# Altium PCB IG-2.PCBDOC (part 1 of 3)
Units mil, origin at the board's own origin, x right, y up, seen from the top; angles counter-clockwise.
Board outline 1834.65 x 964.57 mil, 4 copper layers (Top, GND Plane, Mid1-Ver, Bottom), stack 61.6 mil thick; 34 components, 46 nets, 345 pads, 276 vias.
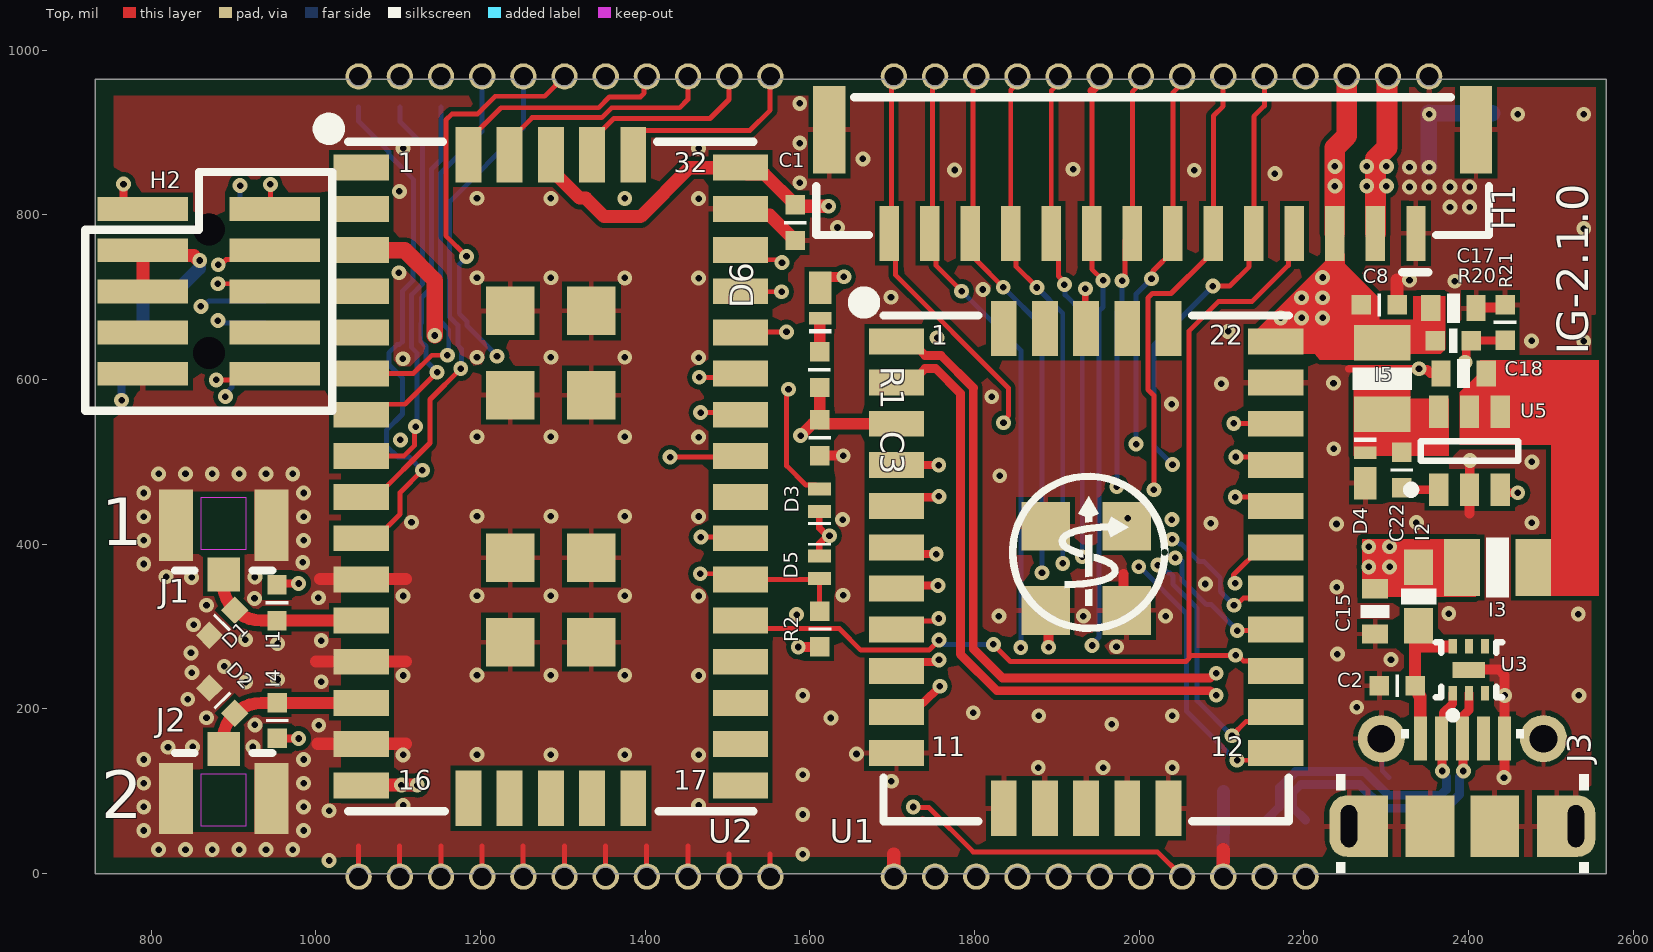
[diagram p0: Top view]
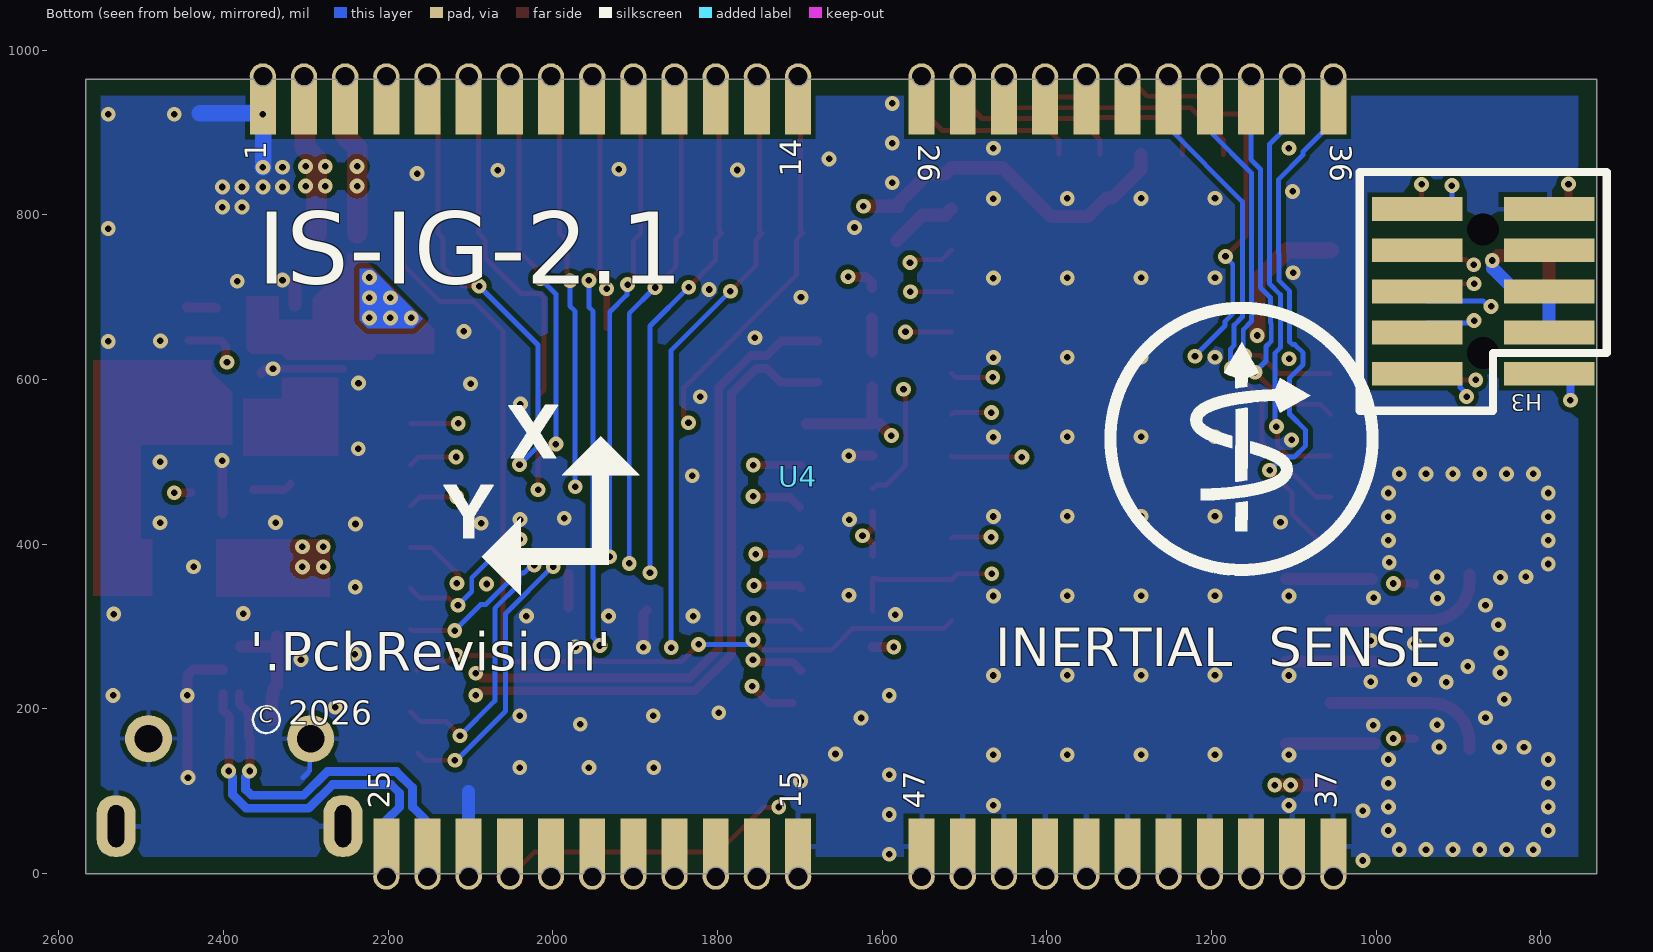
[diagram p1: Bottom view, seen from below]
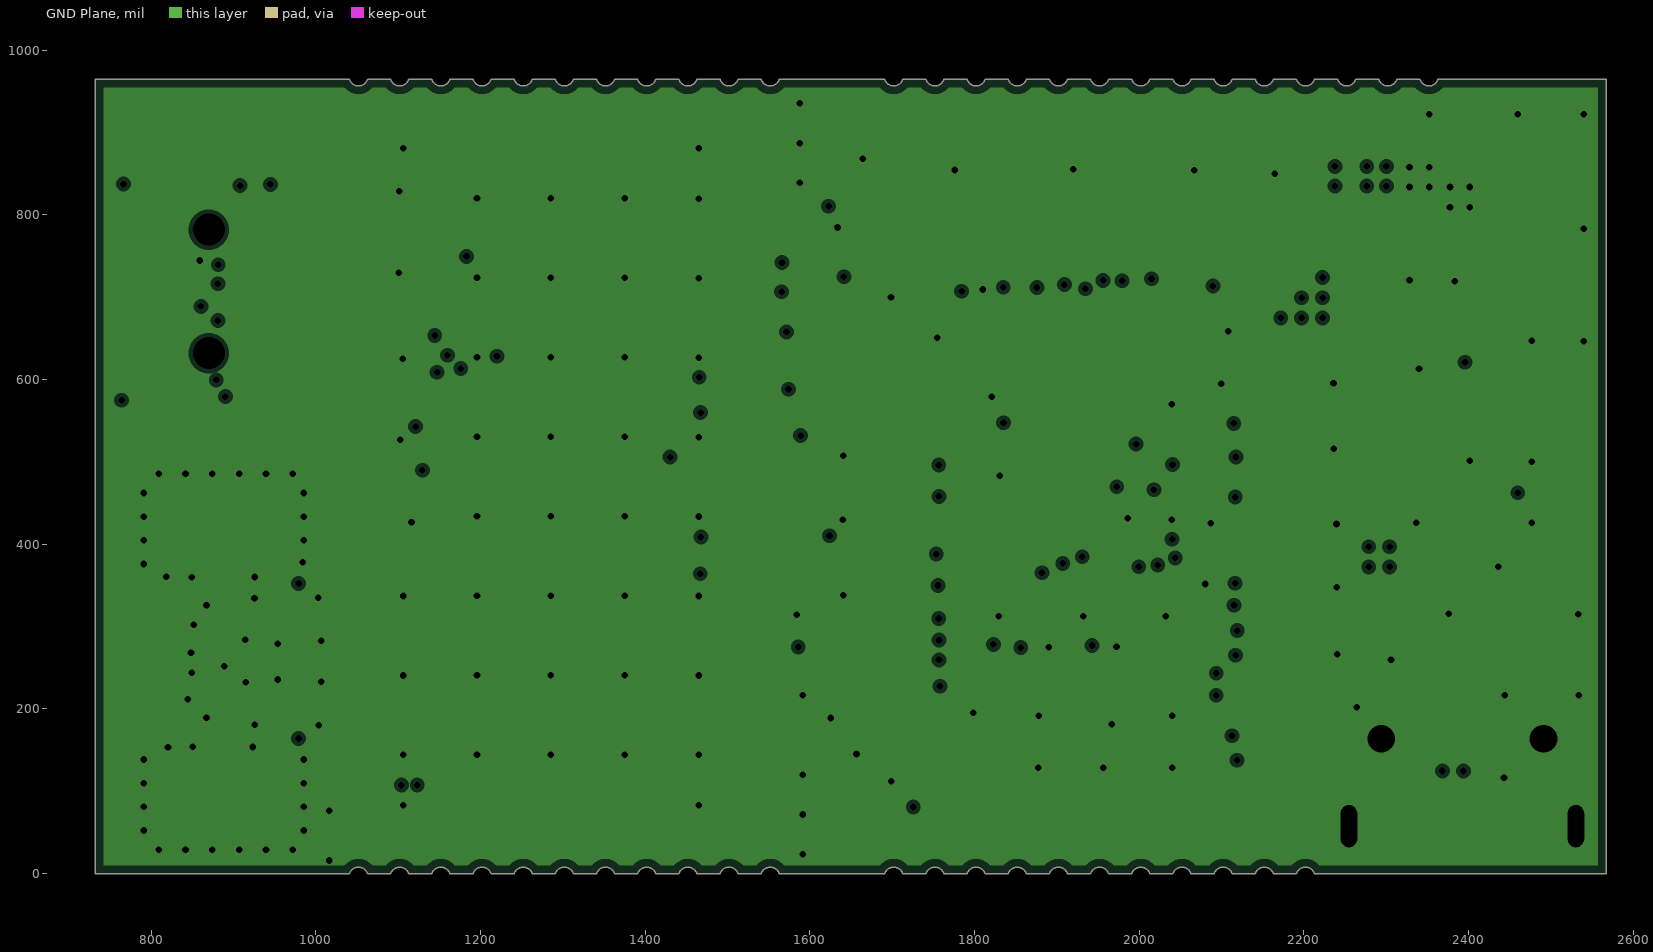
[diagram p2: GND Plane, clearances drawn from the general rule]
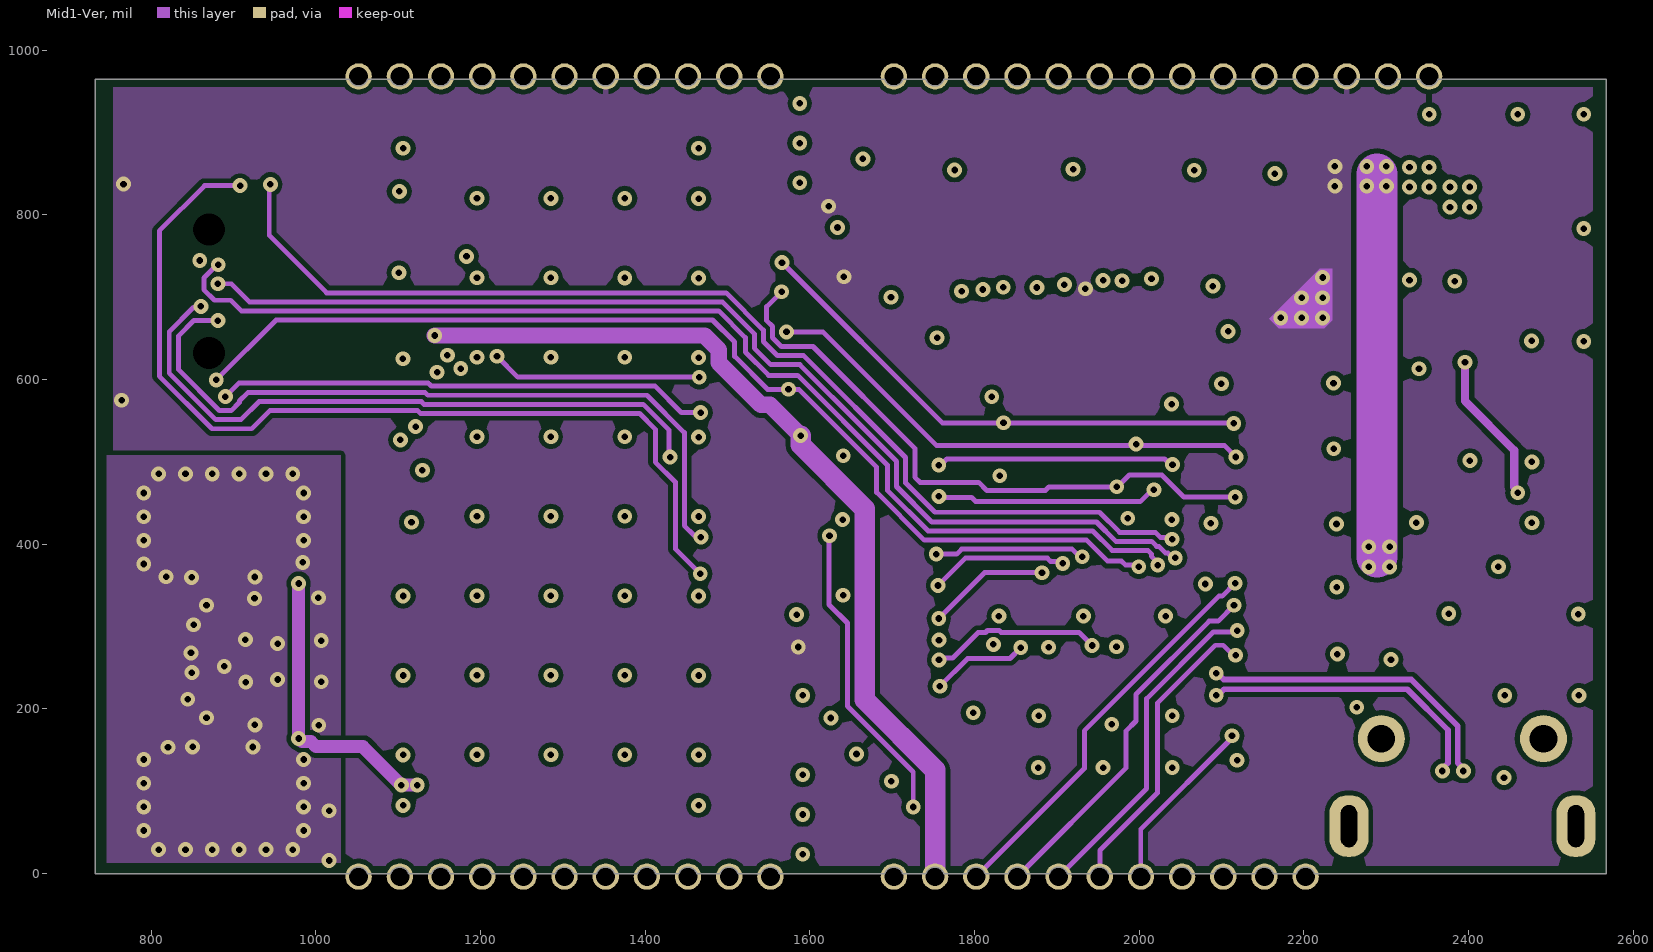
[diagram p3: Mid1-Ver]
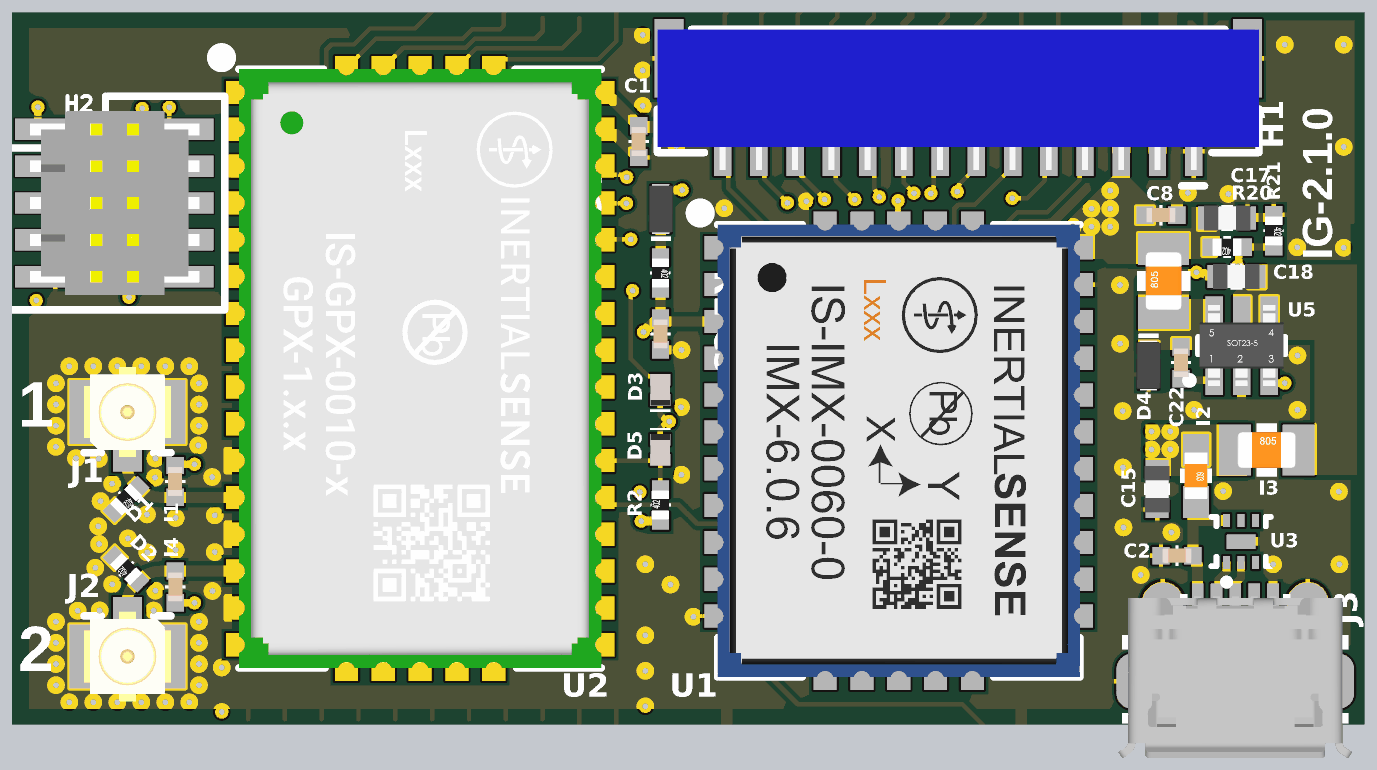
[diagram p5: 3D render of the assembled board from above, using the file's embedded part models]

## Layer stack, top to bottom
Solder Mask Top: solder mask 0.4, Solder Resist, Dk 3.5
Top: signal copper 2.1
Dielectric1: prepreg 8, PP-006, Dk 4.1
GND Plane: plane copper 0.7, net GND
Dielectric3: core 40, Core-009, Dk 4.5
Mid1-Ver: signal copper 0.7
Dielectric2: prepreg 8, PP-006, Dk 4.1
Bottom: signal copper 2.1
Solder Mask Bottom: solder mask 0.4, Solder Resist, Dk 3.5

## Board outline
1112.8,0 1140.92,0 cw(c1151.86,-3.54) 1162.8,0 1190.92,0 cw(c1201.86,-3.54) 1212.8,0 1240.92,0 cw(c1251.86,-3.54) 1262.8,0 1290.92,0 cw(c1301.86,-3.54) 1312.8,0 1340.92,0 cw(c1351.86,-3.54) 1362.8,0 1390.92,0 cw(c1401.86,-3.54) 1412.8,0 1440.92,0 cw(c1451.86,-3.54) 1462.8,0 1490.92,0 cw(c1501.86,-3.54) 1512.8,0 1540.92,0 cw(c1551.86,-3.54) 1562.8,0 1690.92,0 cw(c1701.86,-3.54) 1712.8,0 1740.92,0 cw(c1751.86,-3.54) 1762.8,0 1790.92,0 cw(c1801.86,-3.54) 1812.8,0 1840.92,0 cw(c1851.86,-3.54) 1862.8,0 1890.92,0 cw(c1901.86,-3.54) 1912.8,0 1940.92,0 cw(c1951.86,-3.54) 1962.8,0 1990.92,0 cw(c2001.86,-3.54) 2012.8,0 2040.92,0 cw(c2051.86,-3.54) 2062.8,0 2090.92,0 cw(c2101.86,-3.54) 2112.8,0 2140.92,0 cw(c2151.86,-3.54) 2162.8,0 2190.92,0 cw(c2201.86,-3.54) 2212.8,0 2566.93,0 2566.93,964.57 2566.7,964.57 2362.8,964.57 cw(c2351.86,968.11) 2340.92,964.57 2312.8,964.57 cw(c2301.86,968.11) 2290.92,964.57 2262.8,964.57 cw(c2251.86,968.11) 2240.92,964.57 2212.8,964.57 cw(c2201.86,968.11) 2190.92,964.57 2162.8,964.57 cw(c2151.86,968.11) 2140.92,964.57 2112.8,964.57 cw(c2101.86,968.11) 2090.92,964.57 2062.8,964.57 cw(c2051.86,968.11) 2040.92,964.57 2012.8,964.57 cw(c2001.86,968.11) 1990.92,964.57 1962.8,964.57 cw(c1951.86,968.11) 1940.92,964.57 1912.8,964.57 cw(c1901.86,968.11) 1890.92,964.57 1862.8,964.57 cw(c1851.86,968.11) 1840.92,964.57 1812.8,964.57 cw(c1801.86,968.11) 1790.92,964.57 1762.8,964.57 cw(c1751.86,968.11) 1740.92,964.57 1712.8,964.57 cw(c1701.86,968.11) 1690.92,964.57 1562.8,964.57 cw(c1551.86,968.11) 1540.92,964.57 1512.8,964.57 cw(c1501.86,968.11) 1490.92,964.57 1462.8,964.57 cw(c1451.86,968.11) 1440.92,964.57 1412.8,964.57 cw(c1401.86,968.11) 1390.92,964.57 1362.8,964.57 cw(c1351.86,968.11) 1340.92,964.57 1312.8,964.57 cw(c1301.86,968.11) 1290.92,964.57 1262.8,964.57 cw(c1251.86,968.11) 1240.92,964.57 1212.8,964.57 cw(c1201.86,968.11) 1190.92,964.57 1162.8,964.57 cw(c1151.86,968.11) 1140.92,964.57 1112.8,964.57 cw(c1101.86,968.11) 1090.92,964.57 1062.8,964.57 cw(c1051.86,968.11) 1040.92,964.57 732.28,964.57 732.28,0 1040.92,0 cw(c1051.86,-3.54) 1062.8,0 1090.92,0 cw(c1101.86,-3.54)

## Design rules (kind name [scope] priority, off if disabled: settings)
AssemblyTestPointUsage [All] p1 off:
AssemblyTestpoint [All] p1 off: testpointundercomponent=TRUE minsize=40 maxsize=100 preferedsize=60 minholesize=0 maxholesize=40 preferedholesize=32 testpointgrid=1 usegrid=TRUE gridtolerance=0.01 allowsidetop=TRUE allowsidebottom=TRUE
BoardOutlineClearance BoardOutlineClearance_1 [OnLayer('Silkscreen Top')] p1: gap=0 ignorepadtopadclearanceinfootprint=FALSE
BoardOutlineClearance [All] p2 off: gap=9.84 ignorepadtopadclearanceinfootprint=FALSE
Clearance "Stitching GND" [IsStitchingVia and InNet('GND') vs (IsVia and (Not IsStitchingVia)) Or IsPad] p1: gap=1.97 ignorepadtopadclearanceinfootprint=FALSE
Clearance "Clearance - GPS Ant" [All vs InNet('GPS1_ANT')] p2: gap=8 ignorepadtopadclearanceinfootprint=FALSE except(0: Arc-Hole Track-Hole SMDPad-Hole THPad-Hole Via-Hole Fill-Hole Poly-Hole Region-Hole Text-Hole)
Clearance [All] p3: gap=5 ignorepadtopadclearanceinfootprint=FALSE except(0: Arc-Hole Track-Hole SMDPad-Hole THPad-Hole Via-Hole Fill-Hole Poly-Hole Region-Hole Text-Hole; 5.91: Arc-Fill Arc-Poly Arc-Region Track-Fill Track-Poly Track-Region SMDPad-Fill SMDPad-Poly SMDPad-Region THPad-Fill THPad-Poly THPad-Region Via-Fill Via-Poly Via-Region Fill-Fill Fill-Poly Fill-Region Poly-Poly Poly-Region Region-Region)
ComponentClearance Ignore [InComponent('H7')] p1: gap=-500 collisioncheckmode=3 verticalgap=-500 showdistances=FALSE
ComponentClearance HeaderClearance [InComponent('H1')] p2: gap=10 collisioncheckmode=3 verticalgap=-10 showdistances=FALSE
ComponentClearance Default [All] p3: gap=10 collisioncheckmode=3 verticalgap=10 showdistances=FALSE
DiffPairsRouting USB [InDifferentialPairClass('USB')] p1: maxlimit=5 minlimit=5 mostfreqgap=5 toplayer_minwidth=10.7 toplayer_maxwidth=10.8 toplayer_prefwidth=10.73 midlayer1_minwidth=6.9 midlayer1_maxwidth=7 midlayer1_prefwidth=6.97 bottomlayer_minwidth=10.7 bottomlayer_maxwidth=10.8 bottomlayer_prefwidth=10.73 impedanceprofiledriven=TRUE impedanceprofileid={BBA8E3E2-537E-421E-AE39-E3884618F825} impedanceprofilevalue=90.000000 maxuncoupledlength=500
DiffPairsRouting [All] p2: maxlimit=8 minlimit=8 mostfreqgap=8 toplayer_minwidth=8 toplayer_maxwidth=15 toplayer_prefwidth=15 midlayer1_minwidth=8 midlayer1_maxwidth=15 midlayer1_prefwidth=15 bottomlayer_minwidth=8 bottomlayer_maxwidth=15 bottomlayer_prefwidth=15 maxuncoupledlength=500
FabricationTestPointUsage [All] p1 off: valid=0 allowmultiple=FALSE
FabricationTestpoint [All] p1 off: side=3 testpointundercomponent=TRUE minsize=40 maxsize=100 preferedsize=60 minholesize=0 maxholesize=40 preferedholesize=32 testpointgrid=1 allowsidetop=TRUE allowsidebottom=TRUE usegrid=TRUE gridtolerance=0.01
HoleSize [All] p1: absolutevalues=TRUE maxlimit=200 minlimit=8 maxpercent=80.000 minpercent=20.000
HoleToHoleClearance [All] p1: gap=9 allowstackedmicrovias=TRUE
MinimumAnnularRing [All] p1: minimumring=4.5
MinimumSolderMaskSliver [All] p1: minsoldermaskwidth=3
PlaneClearance [All] p1: clearance=5
PlaneConnect "Power Plane Connect Style" [All] p1: planeconnectstyle=Direct reliefexpansion=20 reliefentries=4 reliefconductorwidth=7 reliefairgap=10
PolygonConnect "No Thermal Polygon Connect" [All vs InNamedPolygon('+1.8_L-01_P-002') or InNamedPolygon('GND_L01_P044') or InPolygonClass('NO THERMALS')] p1: connectstyle=Direct reliefconductorwidth=10 reliefentries=4 polygonreliefangle="90 Angle" airgapwidth=10
PolygonConnect "Default Polygon Connect" [All] p2: thpad.connectstyle=Relief thpad.reliefconductorwidth=5.91 thpad.reliefentries=4 thpad.polygonreliefangle="90 Angle" thpad.airgapwidth=5.91 smdpad.connectstyle=Relief smdpad.reliefconductorwidth=5.91 smdpad.reliefentries=4 smdpad.polygonreliefangle="90 Angle" smdpad.airgapwidth=5.91 via.connectstyle=Direct via.reliefconductorwidth=10 via.reliefentries=4 via.polygonreliefangle="90 Angle" via.airgapwidth=10
RoutingCorners "Routing Corners Default" [All] p1: cornerstyle=45-Degree minsetback=100 maxsetback=100
RoutingLayers "Routing Layers Default" [All] p1: top layer_v5=TRUE mid layer 1_v5=TRUE bottom layer_v5=TRUE
RoutingPriority "Routing Priority Default" [All] p1: routingpriority=0
RoutingVias "Via Style Default" [All] p1: holewidth=8 width=18 viastyle="Through Hole" minholewidth=8 minwidth=18 maxholewidth=8 maxwidth=18
SilkToBoardRegionClearance [All] p1 off:
SilkToSilkClearance [Not ( ((ObjectKind = 'Text') And ((UseInvertedRectangle = 'True') OR (IsTextInverted = 'True'))) OR (ObjectKind = 'Fill') ) vs Not ( ((ObjectKind = 'Text') And ((UseInvertedRectangle = 'True') OR (IsTextInverted = 'True'))) OR (ObjectKind = 'Fill') )] p1: silktosilkclearance=0.98
SilkToSolderMaskClearance SilkscreenOverComponentPads [NOT(IsPad AND OnLayer('Multi-Layer'))] p1: minsilkscreentomaskgap=0 clearancetoexposedcopper=TRUE
SolderMaskExpansion SolderMaskExpansion_Via [IsVia] p1: expansion=-19.68 istentingtop=FALSE
SolderMaskExpansion "Solder Mask Expansion" [All] p2: expansion=3 istentingtop=FALSE
SupplyNets "Schematic Supply Nets_3" [InNet('VIN')] p1: voltage=0.000
SupplyNets "Schematic Supply Nets_2" [InNet('GND')] p2: voltage=0.000
SupplyNets "Schematic Supply Nets_1" [InNet('+3.3V')] p3: voltage=0.000
SupplyNets "Schematic Supply Nets" [InNet('VBAT')] p4: voltage=0.000
Width "RF GPS" [InNetClass('RF_GPS')] p1: maxlimit=14.96 minlimit=14.88 preferedwidth=14.88
Width "Width Default" [All] p2: maxlimit=150 minlimit=3 preferedwidth=6
13 further rules are at their usual default settings.

## Classes and differential pairs
differential pair class USB: USB.D
net class RF_GPS: GNSS1_ANT GNSS2_ANT
polygon class "NO THERMALS": RF_GND_L-01_P-001 RF_GND_L-03_P-001
differential pair USB.D: +USB.D_P -USB.D_N

## Components (designator, comment, footprint, x,y, rotation, side; value= is the part's Value field where it differs from the comment)
C1 "Cap" 0402 1582.28,790.55 r270 top value=0.1uF
C2 "Cap" 0402 2313.28,228.32 r180 top value=100nF
C3 "Cap" 0402 1611.89,529.36 r270 top value=2.2uF
C8 "Cap" 0402 2291.52,690.61 r0 top value=0.1uF
C15 "Cap" 0603 2286.32,318.59 r270 top value=2.2uF
C17 "Cap" 0603 2381.4,686.69 r0 top value=22uF
C18 "Cap" 0603 2394.04,607.28 r180 top value=2.2uF
C22 "Cap" 0402 2318.82,490.22 r90 top value=0.1uF
D1 "Diode - Bidirectional Zener" R0402 886.22,304.72 r225 top
D2 "Diode - Bidirectional Zener" R0402 886.22,210.11 r135 top
D3 "Diode - Schottky" D0402 1611.63,453.36 r90 top
D4 "Diode - Schottky" D0603B 2274.66,486.58 r270 top
D5 "Diode - Schottky" D0402 1611.63,372.05 r270 top
D6 "Diode - Schottky" D0603B 1612.51,699.01 r90 top
H1 "Hdr - 14pin - mount" SM14B-GHS-TB(LF)(SN) 2016.21,956.74 r180 top locked
H2 "Hdr - 5x2pin" FTSH-105-01-L-DV-K-A-P 870.08,707.09 r270 top
H3 "Hdr - 5x2pin" FTSH-105-01-L-DV-K-A-P 870.08,707.09 r90 bottom
I1 "Inductor" 0402 952.91,328.99 r270 top value=120nH
I2 "Inductor" I0603 2339.3,336.68 r270 top value="220 Ohm @ 100MHz"
I3 "Inductor" 0806 2435.18,371.7 r0 top value=2.2uH
I4 "Inductor" 0402 953.1,185.85 r90 top value=120nH
I5 "Inductor" 0806 2295.1,601.29 r90 top value=2.2uH
J1 "RF - GND x 2" "RF UMC SMD" 888.12,423.23 r270 top locked
J2 "RF - GND x 2" "RF UMC SMD" 888.12,91.37 r90 top locked
J3 "USB-TYPEAB-4GND" "USB Micro AB R/A THR" 2392.51,57.75 r0 top locked
R1 "Res" R0402 1611.89,612.04 r270 top value=1K
R2 "Res" R0402 1611.88,297.14 r90 top value=10K
R20 "Res" R0402 2381.4,647.32 r180 top value=30.9K
R21 "Res" R0402 2444.66,669.39 r270 top value=10K
U1 "IMX" IS-IMX-6 1689.41,677.83 r0 top
U2 "GPX" IS-GPX-1.0 1039.43,888.8 r0 top locked
U3 "VBUS053" QFN50P160X160X60-6N 2400.37,247.46 r90 top
U4 "IG 2.0 LGA PADS" IG-2.0_LGA 0,0 r0 top locked
U5 "ADP2301" MO-178-AB 2401.09,513.46 r90 top

## Footprints (in the part's own frame and the unit in brackets; to place one, negate y for a bottom-side part, rotate by r counter-clockwise, add the part's x,y. Pads: shape width x height; smd on the part's side, far side on the other; paste and mask are expansions set on the pad)
0402 [mm]
  rect 0.6x0.6 smd: 1(-0.55,0) 2(0.55,0)
  silkscreen extent -0.05,-0.35 0.05,0.35, body extent -0.5,-0.25 0.5,0.25, height 0.51
0603 [mm]
  rect 0.6x0.8 smd: 1(-0.7,0) 2(0.7,0)
  silkscreen extent -0.2,-0.45 0.2,0.45, body extent -0.8,-0.43 0.8,0.43, height 0.87
0806 [mm]
  rect 1.1x1.75 smd: 1(-1.1,0) 2(1.1,0)
  silkscreen extent -0.35,-0.92 0.35,0.92, body extent -1,-0.62 1,0.63, height 0.78
D0402 [mm]
  rect 0.4x0.7 smd: A(0.35,0) C(-0.35,0)
  silkscreen extent -0.76,-0.35 -0.68,0.35, body extent -0.55,-0.33 0.55,0.33, height 0.56
D0603B [mm] "Molded Diode, 2-Leads, Body 1.60x0.80mm, IPC Medium Density"
  rect 1.005x0.69 smd: A(0.312,0)
  rect 0.385x0.69 smd: C(-0.625,0)
  silkscreen extent -1.1,-0.35 -0.95,0.35, body extent -0.86,-0.42 0.86,0.42, height 0.45
FTSH-105-01-L-DV-K-A-P [mil] "Samtec 2x5 1.27mm Header"
  rect 29x110 smd mask+2: 1(-100,-80) 2(-100,80) 3(-50,-80) 4(-50,80) 5(0,-80) 6(0,80) 7(50,-80) 8(50,80) 9(100,-80) 10(100,80)
  round 0 hole 38.98 unplated: 11(-75,0) 12(75,0)
  silkscreen extent -145,-150 145,150, body extent -125,-114 125,116, height 241
I0603 [mm]
  rect 1.1x0.9 smd: 1(-0.9,0) 2(0.9,0)
  silkscreen extent -0.25,-0.55 0.25,0.55, body extent -0.8,-0.4 0.8,0.4, height 0.3
IG-2.0_LGA [mm] "IMX multi-frequency RTK-GNSS Module"
  rect 0.8x1.7 smd far side paste-2.54: 1(59.743,23.65) 2(58.473,23.65) 3(57.203,23.65) 4(55.933,23.65) 5(54.663,23.65) 6(53.393,23.65) 7(52.123,23.65) 8(50.853,23.65) 9(49.583,23.65) 10(48.313,23.65) 11(47.043,23.65) 12(45.773,23.65) 13(44.503,23.65) 14(43.233,23.65) 15(43.233,0.85) 16(44.503,0.85) 17(45.773,0.85) 18(47.043,0.85) 19(48.313,0.85) 20(49.583,0.85) 21(50.853,0.85) 22(52.123,0.85) 23(53.393,0.85) 24(54.663,0.85) 25(55.933,0.85) 26(39.423,23.65) 27(38.153,23.65) 28(36.883,23.65) 29(35.613,23.65) 30(34.343,23.65) 31(33.073,23.65) 32(31.803,23.65) 33(30.533,23.65) 34(29.263,23.65) 35(27.993,23.65) 36(26.723,23.65) 37(26.723,0.85) 38(27.993,0.85) 39(29.263,0.85) 40(30.533,0.85) 41(31.803,0.85) 42(33.073,0.85) 43(34.343,0.85) 44(35.613,0.85) 45(36.883,0.85) 46(38.153,0.85) 47(39.423,0.85)
  rect 0.8x0.4 smd far side paste-2 mask+0.038: 1(59.743,24.25) 2(58.473,24.25) 3(57.203,24.25) 4(55.933,24.25) 5(54.663,24.25) 6(53.393,24.25) 7(52.123,24.25) 8(50.853,24.25) 9(49.583,24.25) 10(48.313,24.25) 11(47.043,24.25) 12(45.773,24.25) 13(44.503,24.25) 14(43.233,24.25) 15(43.233,0.25) 16(44.503,0.25) 17(45.773,0.25) 18(47.043,0.25) 19(48.313,0.25) 20(49.583,0.25) 21(50.853,0.25) 22(52.123,0.25) 23(53.393,0.25) 24(54.663,0.25) 25(55.933,0.25) 26(39.423,24.25) 27(38.153,24.25) 28(36.883,24.25) 29(35.613,24.25) 30(34.343,24.25) 31(33.073,24.25) 32(31.803,24.25) 33(30.533,24.25) 34(29.263,24.25) 35(27.993,24.25) 36(26.723,24.25) 37(26.723,0.25) 38(27.993,0.25) 39(29.263,0.25) 40(30.533,0.25) 41(31.803,0.25) 42(33.073,0.25) 43(34.343,0.25) 44(35.613,0.25) 45(36.883,0.25) 46(38.153,0.25) 47(39.423,0.25)
  round 0.813 hole 0.584 mask-0.051: 1(59.743,24.59) 2(58.473,24.59) 3(57.203,24.59) 4(55.933,24.59) 5(54.663,24.59) 6(53.393,24.59) 7(52.123,24.59) 8(50.853,24.59) 9(49.583,24.59) 10(48.313,24.59) 11(47.043,24.59) 12(45.773,24.59) 13(44.503,24.59) 14(43.233,24.59) 15(43.233,-0.09) 16(44.503,-0.09) 17(45.773,-0.09) 18(47.043,-0.09) 19(48.313,-0.09) 20(49.583,-0.09) 21(50.853,-0.09) 22(52.123,-0.09) 23(53.393,-0.09) 24(54.663,-0.09) 25(55.933,-0.09) 26(39.423,24.59) 27(38.153,24.59) 28(36.883,24.59) 29(35.613,24.59) 30(34.343,24.59) 31(33.073,24.59) 32(31.803,24.59) 33(30.533,24.59) 34(29.263,24.59) 35(27.993,24.59) 36(26.723,24.59) 37(26.723,-0.09) 38(27.993,-0.09) 39(29.263,-0.09) 40(30.533,-0.09) 41(31.803,-0.09) 42(33.073,-0.09) 43(34.343,-0.09) 44(35.613,-0.09) 45(36.883,-0.09) 46(38.153,-0.09) 47(39.423,-0.09)
  body extent 25.33,0.05 60.14,24.45, height 0
IS-GPX-1.0 [mm] "Inerial Sense GPX-1.0, 42pins 1.27mm pitch"
  rect 1.5x1.5 smd: 0(5,-15.435) 0(5,-12.835) 0(5,-7.815) 0(5,-5.215) 0(7.5,-15.435) 0(7.5,-12.835) 0(7.5,-7.815) 0(7.5,-5.215)
  rect 1.7x0.8 smd paste-2.54: 1(0.4,-0.8) 2(0.4,-2.07) 3(0.4,-3.34) 4(0.4,-4.61) 5(0.4,-5.88) 6(0.4,-7.15) 7(0.4,-8.42) 8(0.4,-9.69) 9(0.4,-10.96) 10(0.4,-12.23) 11(0.4,-13.5) 12(0.4,-14.77) 13(0.4,-16.04) 14(0.4,-17.31) 15(0.4,-18.58) 16(0.4,-19.85) 17(12.1,-19.85) 18(12.1,-18.58) 19(12.1,-17.31) 20(12.1,-16.04) 21(12.1,-14.77) 22(12.1,-13.5) 23(12.1,-12.23) 24(12.1,-10.96) 25(12.1,-9.69) 26(12.1,-8.42) 27(12.1,-7.15) 28(12.1,-5.88) 29(12.1,-4.61) 30(12.1,-3.34) 31(12.1,-2.07) 32(12.1,-0.8)
  rect 0.8x1.7 smd paste-2.54: 33(3.71,-20.25) 34(4.98,-20.25) 35(6.25,-20.25) 36(7.52,-20.25) 37(8.79,-20.25) 38(8.79,-0.4) 39(7.52,-0.4) 40(6.25,-0.4) 41(4.98,-0.4) 42(3.71,-0.4)
  silkscreen extent -0.85,-20.65 12.5,0.65, body extent 0,-20.65 12.5,0, height 2.88
IS-IMX-6 [mm] "Inerial Sense IMX-6, 22pins 1.27mm pitch"
  rect 1.5x1.5 smd: 0(5,-9.1) 0(5,-6.5) 0(7.5,-9.1) 0(7.5,-6.5)
  rect 1.7x0.8 smd: 1(0.4,-0.8) 2(0.4,-2.07) 3(0.4,-3.34) 4(0.4,-4.61) 5(0.4,-5.88) 6(0.4,-7.15) 7(0.4,-8.42) 8(0.4,-9.69) 9(0.4,-10.96) 10(0.4,-12.23) 11(0.4,-13.5) 12(12.1,-13.5) 13(12.1,-12.23) 14(12.1,-10.96) 15(12.1,-9.69) 16(12.1,-8.42) 17(12.1,-7.15) 18(12.1,-5.88) 19(12.1,-4.61) 20(12.1,-3.34) 21(12.1,-2.07) 22(12.1,-0.8)
  rect 0.8x1.7 smd: 23(3.71,-15.2) 24(4.98,-15.2) 25(6.25,-15.2) 26(7.52,-15.2) 27(8.79,-15.2) 28(8.79,-0.4) 29(7.52,-0.4) 30(6.25,-0.4) 31(4.98,-0.4) 32(3.71,-0.4)
  silkscreen extent -0.85,-15.6 12.5,0.65, body extent 0,-15.6 12.5,0, height 2.98
MO-178-AB [mm] "SOT23, 6-Leads, Body 3.0x2.8mm (max), Pitch 0.95mm, IPC Medium Density"
  rect 1x0.6 smd: 1(-1.2,0.95) 2(-1.2,0) 3(-1.2,-0.95) 4(1.2,-0.95) 5(1.2,0) 6(1.2,0.95)
  silkscreen extent -1.32,-1.5 0.3,1.92, body extent -1.4,-1.45 1.41,1.45, height 1.12
QFN50P160X160X60-6N [mm] "QFN, 6-Leads, Body 1.6x1.6mm (max), Pitch 0.50mm, IPC Medium Density"
  rect 0.45x0.25 smd: 1(-0.725,0.5) 2(-0.725,0) 3(-0.725,-0.5) 4(0.725,-0.5) 5(0.725,0) 6(0.725,0.5)
  rect 0.5x1 smd: 7(0,0)
  silkscreen extent -1.5,-1.02 0.85,1.02, body extent -0.82,-0.82 0.82,0.82, height 0.6
R0402 [mm]
  rect 0.6x0.6 smd: 1(-0.55,0) 2(0.55,0)
  silkscreen extent -0.05,-0.36 0.05,0.34, body extent -0.5,-0.3 0.5,0.3, height 0.2
"RF UMC SMD" [mm] "Ultra Miniature Coaxial Surface Mount"
  rect 1.05x1 smd: 1(1.525,0)
  rect 2.2x1.05 smd: 2(0,-1.475) 3(0,1.475)
  Top pour cut-out: -1.05,0.95 -1.05,-0.95 0.9,-0.95 0.9,0.95
  Top keep-out region: -0.85,0.7 -0.85,-0.7 0.75,-0.7 0.75,0.7
  silkscreen extent 1.4,-1.5 1.4,1.5, body extent -1.55,-1.5 1.55,1.5, height 1.3
SM14B-GHS-TB(LF)(SN) [mm] "CONN HEADER GH TOP 15POS 1.25MM"
  rect 1x2.7 smd: 0(-9.975,1.35) 0(9.975,1.35)
  rect 0.6x1.7 smd: 1(-8.125,4.55) 2(-6.875,4.55) 3(-5.625,4.55) 4(-4.375,4.55) 5(-3.125,4.55) 6(-1.875,4.55) 7(-0.625,4.55) 8(0.625,4.55) 9(1.875,4.55) 10(3.125,4.55) 11(4.375,4.55) 12(5.625,4.55) 13(6.875,4.55) 14(8.125,4.55)
  silkscreen extent -10.38,0.35 10.38,5.75, body extent -10.37,0.35 10.37,5.2, height 4.35
"USB Micro AB R/A THR" [mm] "USB Micro AB R/A Through Hole"
  rect 0.4x1.35 smd: 1(-1.3,2.7) 2(-0.65,2.7) 3(0,2.7) 4(0.65,2.7) 5(1.3,2.7)
  rrect90% 1.2x1.9 hole 0.5 slot 1.3 at 90 deg paste-2539.97 mask+0.076: 6(-3.5,0)
  rect 1.2x1.9 smd: 6(-2.9,0) 7(2.9,0)
  round 1.45 hole 0.85 mask+0.102: 6(-2.5,2.7) 7(2.5,2.7)
  rrect90% 1.2x1.9 hole 0.5 slot 1.3 at 90 deg mask+0.076: 7(3.5,0)
  rect 1.5x1.9 smd: 8(-1,0) 9(1,0)
  silkscreen extent -3.9,-1.45 3.9,3, body extent -4.02,-2.65 4.03,2.92, height 2.69

## Part data
C1 C2 C8: "CAP CER .10UF 50V X7R 10% 0402", Capacitance=0.1µF, Manufacturer="TDK Corporation", Manufacturer Part Number=C1005X7R1H104K, Operating Temperature="-55°C ~ 125°C", Package / Case="0402 (1005 Metric)", Ratings=-, Supplier Part Number 1=445-5932-1-ND, Temperature Coefficient=X7R, Tolerance=±10%, Voltage - Rated=50V, Applications="General Purpose", Category=Capacitors, ComponentLink1Description=http://www.tdk.co.jp/tefe02/e412_c.pdf, ComponentLink1URL=http://www.tdk.co.jp/tefe02/e412_c.pdf, Features=-, Height=-, LatestRevisionDate=17-Jul-2002, LatestRevisionNote="Re-released for DXP Platform.", Lead Spacing=-, Lead Style=-, Mounting Type="Surface Mount, MLCC", Packaging="Cut Tape (CT)", Pricing 1="1=0.3, 10=0.2, 100=0.08, 250=0.05752, 500=0.041, 1000=0.03 (USD)", Published=8-Jun-2000, Publisher="Altium Limited", RoHS="RoHS Compliant", Size / Dimension="0.039\" L x 0.020\" W (1.00mm x 0.50mm)", Stock 1=174080, Supplier 1=Digi-Key, Thickness="0.022\" (0.55mm)"
C3: "0402 2.2 uF 6.3 V ±10% Tolerance X6S Multilayer Ceramic Capacitor", Case Code (Imperial)=0402, Case Code (Metric)=1005, Manufacturer=Murata, Manufacturer Part Number=GRM155C80J225KE95D, Max Operating Temperature=105°C, Min Operating Temperature=-55°C, Supplier Part Number=490-10012-2-ND, Tolerance=10%, Voltage Rating=6.3V, Case/Package=0402, Category=Capacitors, ComponentLink1Description=http://search.murata.co.jp/Ceramy/image/img/A01X/G101/ENG/GRM155C80J225KE95-01.pdf?src-supplier=Digi-Key, ComponentLink1URL=http://search.murata.co.jp/Ceramy/image/img/A01X/G101/ENG/GRM155C80J225KE95-01.pdf?src-supplier=Digi-Key, ComponentLink2Description=http://search.murata.co.jp/Ceramy/image/img/A01X/partnumbering_e_01.pdf?src-supplier=Digi-Key, ComponentLink2URL=http://search.murata.co.jp/Ceramy/image/img/A01X/partnumbering_e_01.pdf?src-supplier=Digi-Key, Height=0.3mm, LatestRevisionDate=17-Jul-2002, LatestRevisionNote="Re-released for DXP Platform.", Length=0.039inch, Material=Ceramic, Mounting Technology="Surface Mount", Packaging="Cut Tape", Pricing="10000=0.01548, 20000=0.01475, 30000=0.01401, 50000=0.01253, 100000=0.01014, 250000=0.00922 (USD)", Published=8-Jun-2000, Publisher="Altium Limited", RoHS=Yes, RoHS Compliant=Yes, Series=GRM, Stock=7200000, Supplier=Digi-Key, Thickness=0.022inch, Voltage Rating (DC)=6.3V, Width=0.02inch
C15 C18: "CAP CER 2.2UF 25V X6S 0603", Capacitance=2.2uF, Case Code (Imperial)=0603, Case Code (Metric)=1608, Dielectric=X6S, Manufacturer=Murata, Manufacturer Part Number=GRT188C81E225KE13D, Max Operating Temperature=105°C, Min Operating Temperature=-55°C, Supplier Part Number 1=490-12293-6-ND, Tolerance=10%, Voltage Rating=25V, Case/Package=0603, Category=Capacitors, ComponentLink1Description=http://www.farnell.com/datasheets/2165949.pdf, ComponentLink1URL=http://www.farnell.com/datasheets/2165949.pdf, ComponentLink2Description=http://search.murata.co.jp/Ceramy/image/img/A01X/G101/ENG/GRT188C81E225KE13-01.pdf, ComponentLink2URL=http://search.murata.co.jp/Ceramy/image/img/A01X/G101/ENG/GRT188C81E225KE13-01.pdf, LatestRevisionDate=17-Jul-2002, LatestRevisionNote="Re-released for DXP Platform.", Length=0.063inch, Mount="Surface Mount", Packaging="Tape and Reel", Pricing 1="1=0.35, 10=0.239, 100=0.1355, 500=0.09564, 1000=0.08369 (USD)", Published=8-Jun-2000, Publisher="Altium Limited", Stock 1=16854, Supplier 1=Digi-Key, Thickness=0.035inch, Voltage Rating (DC)=25V, Width=0.031inch
C17: "CAP CER 22UF 6.3V X6S 0603", Capacitance=22uF, Case Code (Imperial)=0603, Case Code (Metric)=1608, Dielectric=X6S, Manufacturer=Murata, Manufacturer Part Number=GRM188C80J226ME15D, Max Operating Temperature=105°C, Min Operating Temperature=-55°C, Package Quantity=4000, Supplier Part Number 1=490-10471-6-ND, Tolerance=20%, Voltage Rating=6.3V, Case/Package=0603, Category=Capacitors, ComponentLink1Description=http://www.mouser.com/ds/2/281/c02e-2905.pdf, ComponentLink1URL=http://www.mouser.com/ds/2/281/c02e-2905.pdf, ComponentLink2Description=http://search.murata.co.jp/Ceramy/image/img/A01X/partnumbering_e_01.pdf, ComponentLink2URL=http://search.murata.co.jp/Ceramy/image/img/A01X/partnumbering_e_01.pdf, Height=0.8mm, LatestRevisionDate=17-Jul-2002, LatestRevisionNote="Re-released for DXP Platform.", Lead Free="Lead Free", Length=0.063inch, Mount="Surface Mount", Packaging="Tape and Reel", Pricing 1="1=0.25, 10=0.168, 100=0.0955, 500=0.0674, 1000=0.05897 (USD)", Published=8-Jun-2000, Publisher="Altium Limited", Stock 1=0, Supplier 1=Digi-Key, Termination=SMD/SMT, Thickness=0.039inch, Voltage Rating (DC)=6.3V, Weight=0.000222oz, Width=0.8mm
C22: "CAP CER 0.1UF 50V X7R 0402", Capacitance=0.1uF, Case Code (Imperial)=0402, Case Code (Metric)=1005, Dielectric=X7R, Manufacturer=TDK, Manufacturer Part Number=CGA2B3X7R1H104K050BB, Max Operating Temperature=125°C, Min Operating Temperature=-55°C, Package Quantity=1, Ratings=AEC-Q200, Supplier Part Number 1=445-6899-1-ND, Tolerance=10%, Voltage=50V, Case/Package=0402, Category=Capacitors, ComponentLink1Description=https://datasheet.ciiva.com/16498/mlccspec-automotive-general-midvoltage-en-16498528.pdf?src-supplier=Future+Electronics, ComponentLink1URL=https://datasheet.ciiva.com/16498/mlccspec-automotive-general-midvoltage-en-16498528.pdf?src-supplier=Future+Electronics, ComponentLink2Description=https://datasheet.ciiva.com/24216/cga2b3x7r1h104k050bb-266281-24216070.pdf?src-supplier=Mouser, ComponentLink2URL=https://datasheet.ciiva.com/24216/cga2b3x7r1h104k050bb-266281-24216070.pdf?src-supplier=Mouser, ComponentLink3Description=https://datasheet.ciiva.com/7975/1788388-7975306.pdf?src-supplier=Element14, ComponentLink3URL=https://datasheet.ciiva.com/7975/1788388-7975306.pdf?src-supplier=Element14, ComponentLink4Description=https://datasheet.ciiva.com/22703/1807242-22703013.pdf?src-supplier=Element14, ComponentLink4URL=https://datasheet.ciiva.com/22703/1807242-22703013.pdf?src-supplier=Element14, ComponentLink5Description=https://datasheet.ciiva.com/22725/1735392-22725627.pdf?src-supplier=Element14, ComponentLink5URL=https://datasheet.ciiva.com/22725/1735392-22725627.pdf?src-supplier=Element14, Composition=Ceramic, Depth=0.5mm, Height=0.5mm, LatestRevisionDate=17-Jul-2002, LatestRevisionNote="Re-released for DXP Platform.", Lead Free="Lead Free", Length=1mm, Mount="Surface Mount", Packaging="Tape and Reel", Pricing 1="1=0.16000, 10=0.11700, 100=0.05500, 500=0.03858, 1000=0.03194, 2500=0.02973, 5000=0.02720 (USD)", Published=8-Jun-2000, Publisher="Altium Limited", REACH SVHC="No SVHC", RoHS=Yes, Stock 1=12402793, Supplier 1=Digi-Key, Termination=SMD/SMT, Thickness=0.022inch, Voltage Rating=50V, Voltage Rating (DC)=50V, Weight=2.3E-05oz, Width=0.02inch
D1 D2: "LITTELFUSE - PESD0402-140 - DIODE, ESD PROTECTION, 0402, FULL REEL", Case/Package=0402, Clamping Voltage=40V, Manufacturer=Littelfuse, Manufacturer Part Number=PESD0402-140, Max Operating Temperature=125°C, Min Operating Temperature=-55°C, Operating Supply Voltage=14V, Power Line Protection=No, Resistor Type=Zener, Supplier Part Number 1=PESD0402-140CT-ND, Category="TVS Diodes", ComponentLink1Description=https://datasheet.ciiva.com/58684/-58684341.pdf?src-supplier=Digi-Key, ComponentLink1URL=https://datasheet.ciiva.com/58684/-58684341.pdf?src-supplier=Digi-Key, Direction=Bidirectional, Lead Free="Lead Free", Mount="Surface Mount", Number of Bidirectional Channels=1, Number of Pins=2, Packaging="Tape and Reel", Pricing 1="1=0.40000, 10=0.32100, 100=0.22900, 500=0.17400, 1000=0.13737, 2000=0.13279, 5000=0.12821 (USD)", REACH SVHC=Unknown, Reverse Standoff Voltage=14V, RoHS=No, Stock 1=211482, Supplier 1=Digi-Key, Turn-On Delay Time=1ns, Working Voltage=14V
D3 D5: "CDBQR0130L; SMT Schottky Diode; 35V 100mA; 2-Pin SOD-923F (0402)", Average Rectified Current=100mA, Case Code (Imperial)=0402, Case Code (Metric)=1005, Manufacturer=Comchip, Manufacturer Part Number=CDBQR0130L, Max Reverse Leakage Current=10uA, Max Reverse Voltage (DC)=30V, Max Surge Current=1A, Package Quantity=1, Supplier Part Number=641-1271-2-ND, Case/Package=0402, Category="Rectifier Diodes", Mounting Technology="Surface Mount", Packaging="Tape and Reel", Pricing="5000=0.05980, 10000=0.05083, 25000=0.04784, 50000=0.04485, 125000=0.03887 (USD)", RoHS=Yes, RoHS Compliant=Yes, Stock=645000, Supplier=Digi-Key
  D3: ComponentLink1Description=https://datasheet.ciiva.com/913/cdbqr0130l-revb795355-913009.pdf?src-supplier=Digi-Key, ComponentLink1URL=https://datasheet.ciiva.com/913/cdbqr0130l-revb795355-913009.pdf?src-supplier=Digi-Key, ComponentLink2Description=https://datasheet.ciiva.com/4716/cdbqr0130l-revb795355-33189-4716003.pdf?src-supplier=Mouser, ComponentLink2URL=https://datasheet.ciiva.com/4716/cdbqr0130l-revb795355-33189-4716003.pdf?src-supplier=Mouser, ComponentLink3Description=https://datasheet.ciiva.com/913/cdbqr0130l-revb795355-913010.pdf?src-supplier=Digi-Key, ComponentLink3URL=https://datasheet.ciiva.com/913/cdbqr0130l-revb795355-913010.pdf?src-supplier=Digi-Key, ComponentLink4Description=https://datasheet.ciiva.com/913/cdbqr0130l-revb795355-913011.pdf?src-supplier=Digi-Key, ComponentLink4URL=https://datasheet.ciiva.com/913/cdbqr0130l-revb795355-913011.pdf?src-supplier=Digi-Key
  D5: ComponentLink1Description=https://datasheet.ciiva.com/8301/bas70lp-8301585.pdf?src-supplier=Avnet, ComponentLink1URL=https://datasheet.ciiva.com/8301/bas70lp-8301585.pdf?src-supplier=Avnet, ComponentLink2Description=https://datasheet.ciiva.com/26949/getdatasheetpartid-661958-26949407.pdf?src-supplier=Verical, ComponentLink2URL=https://datasheet.ciiva.com/26949/getdatasheetpartid-661958-26949407.pdf?src-supplier=Verical, ComponentLink3Description=https://datasheet.ciiva.com/18567/bas70lp-18567705.pdf?src-supplier=Digi-Key, ComponentLink3URL=https://datasheet.ciiva.com/18567/bas70lp-18567705.pdf?src-supplier=Digi-Key, ComponentLink4Description=https://datasheet.ciiva.com/16418/bas70lp-16418375.pdf?src-supplier=Future+Electronics, ComponentLink4URL=https://datasheet.ciiva.com/16418/bas70lp-16418375.pdf?src-supplier=Future+Electronics, ComponentLink5Description=https://datasheet.ciiva.com/913/cdbqr0130l-revb795355-913009.pdf?src-supplier=Digi-Key, ComponentLink5URL=https://datasheet.ciiva.com/913/cdbqr0130l-revb795355-913009.pdf?src-supplier=Digi-Key, ComponentLink6Description=https://datasheet.ciiva.com/4716/cdbqr0130l-revb795355-33189-4716003.pdf?src-supplier=Mouser, ComponentLink6URL=https://datasheet.ciiva.com/4716/cdbqr0130l-revb795355-33189-4716003.pdf?src-supplier=Mouser, ComponentLink7Description=https://datasheet.ciiva.com/913/cdbqr0130l-revb795355-913010.pdf?src-supplier=Digi-Key, ComponentLink7URL=https://datasheet.ciiva.com/913/cdbqr0130l-revb795355-913010.pdf?src-supplier=Digi-Key, ComponentLink8Description=https://datasheet.ciiva.com/913/cdbqr0130l-revb795355-913011.pdf?src-supplier=Digi-Key, ComponentLink8URL=https://datasheet.ciiva.com/913/cdbqr0130l-revb795355-913011.pdf?src-supplier=Digi-Key
D4 D6: "DIODE SCHOTTKY 30V 2A 0603", Manufacturer=Vishay, Manufacturer Part Number=VSKY20301608-G4-08, Supplier Part Number 1=VSKY20301608-G4-08GICT-ND, ComponentLink1Description=http://www.mouser.com/ds/2/427/vsky20301608-777242.pdf, ComponentLink1URL=http://www.mouser.com/ds/2/427/vsky20301608-777242.pdf, Pricing 1="1=0.38, 10=0.305, 25=0.2792, 100=0.2076, 250=0.1882, 500=0.15574, 1000=0.1168, 2500=0.10707 (USD)", Stock 1=13064, Supplier 1=Digi-Key
H1: "Conn Shrouded Header HDR 14 POS 1.25mm Solder ST Top Entry SMD T/R", Manufacturer=JST, Manufacturer Part Number=SM14B-GHS-TB(LF)(SN), Supplier Part Number 1=455-1576-2-ND, Category=Connectors, Pricing 1="2500=0.35044, 5000=0.33876, 12500=0.31072, 25000=0.30371 (USD)", RoHS=No, Supplier 1=Digi-Key
H2 H3: "CONN HEADER 10POS DUAL .05\" SMD", Housing Colour=Black, Manufacturer=Samtec, Manufacturer Part Number=FTSH-105-01-L-DV-K-A-P, Max Operating Temperature=125°C, Min Operating Temperature=-55°C, Supplier Part Number 1=SAM9440-ND, ComponentLink1Description=http://www.samtec.com/documents/webfiles/pdf/FTSH_SMT.pdf, ComponentLink1URL=http://www.samtec.com/documents/webfiles/pdf/FTSH_SMT.pdf, Contact Material=Bronze, Contact Plating=Gold, Depth=3.43mm, Gender=Male, Housing Material=Polymer, Lead Free="Lead Free", Length=6.35mm, Number of Contacts=10, Number of Rows=2, Orientation=Straight, Packaging=Bulk, Pitch=1.27mm, Pricing 1="1=4.15, 92=3.48598, 184=3.32, 552=2.82199, 1012=2.407 (USD)", Radiation Hardening=No, Stock 1=3679, Supplier 1=Digi-Key, Termination=Solder
I1 I4: "Inductor RF Chip Wirewound 120nH 5% 100MHz 20Q-Factor 110mA 2.66Ohm DCR 0402 Paper T/R", Case Code (Imperial)=0402, Case Code (Metric)=1005, Current Rating=110mA, DC Resistance (DCR)=2.66R, Inductance=120nH, Inductance Tolerance=5%, Manufacturer=Murata, Manufacturer Part Number=LQW15ANR12J00D, Max Operating Temperature=125°C, Min Operating Temperature=-55°C, Package Quantity=10000, Self Resonant Frequency=1GHz, Supplier Part Number 1=490-4091-1-ND, Test Frequency=100MHz, Case/Package=0402, Category="Fixed Inductors", ComponentLink1Description=http://search.murata.co.jp/Ceramy/image/img/PDF/ENG/L0075S0083LQG15HS.pdf, ComponentLink1URL=http://search.murata.co.jp/Ceramy/image/img/PDF/ENG/L0075S0083LQG15HS.pdf, ComponentLink2Description=https://datasheet.ciiva.com/11799/0900766b8090d800-11799096.pdf?src-supplier=RSComponents, ComponentLink2URL=https://datasheet.ciiva.com/11799/0900766b8090d800-11799096.pdf?src-supplier=RSComponents, ComponentLink3Description=https://datasheet.ciiva.com/1042/l0075s0080lqw15a-00-1042180.pdf?src-supplier=Digi-Key, ComponentLink3URL=https://datasheet.ciiva.com/1042/l0075s0080lqw15a-00-1042180.pdf?src-supplier=Digi-Key, ComponentLink4Description=https://datasheet.ciiva.com/1042/l0075s0080lqw15a-00-1042181.pdf?src-supplier=Digi-Key, ComponentLink4URL=https://datasheet.ciiva.com/1042/l0075s0080lqw15a-00-1042181.pdf?src-supplier=Digi-Key, ComponentLink5Description=https://datasheet.ciiva.com/1042/l0075s0080lqw15a-00-1042182.pdf?src-supplier=Digi-Key, ComponentLink5URL=https://datasheet.ciiva.com/1042/l0075s0080lqw15a-00-1042182.pdf?src-supplier=Digi-Key, ComponentLink6Description=https://datasheet.ciiva.com/16207/l0075s0080lqw15a-00-16207819.pdf?src-supplier=Future+Electronics, ComponentLink6URL=https://datasheet.ciiva.com/16207/l0075s0080lqw15a-00-16207819.pdf?src-supplier=Future+Electronics, ComponentLink7Description=https://datasheet.ciiva.com/8506/l0075s0080lqw15a-00-8506030.pdf?src-supplier=Avnet, ComponentLink7URL=https://datasheet.ciiva.com/8506/l0075s0080lqw15a-00-8506030.pdf?src-supplier=Avnet, Core Material=Air,Ferrite, DC Current=110mA, Depth=0.6mm, Height=0.5mm, Lead Free="Lead Free", Length=1mm, Max DC Current=110mA, Military Standard=Not, Mount="Surface Mount", Number of Pins=2, Packaging="Tape and Reel", Pricing 1="1=0.15000, 10=0.13500, 25=0.12000, 50=0.10200, 100=0.09000, 250=0.08252, 500=0.07500, 1000=0.06300, 2500=0.05400 (USD)", Radiation Hardening=No, REACH SVHC="No SVHC", RoHS=Yes, Shielding=Unshielded, Stock 1=2053, Supplier 1=Digi-Key, Termination=SMD/SMT, Tolerance=5%, Weight=2.8E-05oz, Width=0.02inch
I2: "FERRITE CHIP 220 OHM 2500MA 0603", Current Rating=2.5A, DC Resistance (DCR)="40 mOhm Max", Impedance @ Frequency="220 Ohm @ 100MHz", Manufacturer="Murata Electronics North America", Manufacturer Part Number=BLM18SG221TN1D, Package / Case="0603 (1608 Metric)", Supplier Part Number 1=490-5225-1-ND, Category=Filters, ComponentLink1Description=http://search.murata.co.jp/Ceramy/image/img/PDF/ENG/L0110S0100BLM18S.pdf, ComponentLink1URL=http://search.murata.co.jp/Ceramy/image/img/PDF/ENG/L0110S0100BLM18S.pdf, Filter Type="Differential Mode - Single", Height (Max)="0.037\" (0.95mm)", Mounting Type="Surface Mount", Packaging="Cut Tape (CT)", Pricing 1="1=0.14, 10=0.116, 50=0.075, 100=0.0646, 250=0.05172, 500=0.04654, 1000=0.03878, 5000=0.03619 (USD)", RoHS="RoHS Compliant", Size / Dimension="0.063\" L x 0.031\" W (1.60mm x 0.80mm)", Stock 1=146728, Supplier 1=Digi-Key
I3 I5: "FIXED IND 2.2UH 1.2A 110 MOHM", Case Code (Imperial)=0806, Case Code (Metric)=2016, Current Rating=1.2A, DC Resistance (DCR)=137.5mR, Inductance=2.2uh, Manufacturer=TDK, Manufacturer Part Number=MLP2016H2R2MT0S1, Max Operating Temperature=125°C, Min Operating Temperature=-40°C, Package Quantity=3000, Supplier Part Number 1=445-15724-6-ND, Test Frequency=2MHz, Tolerance=20%, Case/Package=0806, ComponentLink1Description=https://datasheet.ciiva.com/29697/inductor-commercial-power-mlp-en-29697725.pdf, ComponentLink1URL=https://datasheet.ciiva.com/29697/inductor-commercial-power-mlp-en-29697725.pdf, ComponentLink2Description=https://datasheet.ciiva.com/29697/inductor-commercial-power-mlp-en-29697726.pdf, ComponentLink2URL=https://datasheet.ciiva.com/29697/inductor-commercial-power-mlp-en-29697726.pdf, Core Material=Ferrite, Height - Seated (Max)=0.039inch, Lead Free="Lead Free", Length=0.079inch, Mount="Surface Mount", Packaging="Tape and Reel", Pricing 1="1=0.38, 10=0.335, 100=0.2302, 500=0.19674, 1000=0.1507 (USD)", Shielding=Unshielded, Stock 1=14048, Supplier 1=Digi-Key, Width=0.063inch
J1 J2: "CONN UMC RCPT STR 50 OHM SMD", Dielectric Material=-, Frequency - Max=6GHz, Housing Color=Gold, Manufacturer="Emerson Network Power Connectivity Johnson", Manufacturer Part Number=128-0711-201, Operating Temperature="-40°C ~ 90°C", Supplier Part Number 1=J983CT-ND, Voltage Rating=200V, Body Finish=Gold, Body Material=-, Cable Group=-, Category="Connectors, Interconnects", Center Contact Material=-, Center Contact Plating=Gold, ComponentLink1Description=http://media.digikey.com/pdf/Data%20Sheets/Emerson%20PDFs/UMC%20Product%20Catalog.pdf, ComponentLink1URL=http://media.digikey.com/pdf/Data%20Sheets/Emerson%20PDFs/UMC%20Product%20Catalog.pdf, Connector Style="Ultra Miniature Coaxial", Connector Type="Receptacle, Male Pins", Contact Termination=Solder, Fastening Type=Snap-On, Features=-, Impedance="50 Ohm", Ingress Protection=-, Mounting Type="Surface Mount", Packaging="Cut Tape (CT)", Pricing 1="1=0.93, 10=0.832, 50=0.784, 100=0.672, 250=0.576, 500=0.544, 750=0.48, 1000=0.448 (USD)", RoHS="RoHS Compliant", Shield Termination=Solder, Stock 1=1514, Supplier 1=Digi-Key
J3: "CONN USB AB 4POS", Colour=Black, Current Rating=1.8A, Flammability Rating="UL94 V-0", Insulation Resistance=1GR, Manufacturer="Amphenol FCI", Manufacturer Part Number=10118194-0001LF, Max Operating Temperature=85°C, Max Voltage Rating (AC)=100V, Min Operating Temperature=-55°C, Package Quantity=9600, Supplier Part Number 1=609-4618-1-ND, ComponentLink1Description=https://datasheet.ciiva.com/851/10118194-851110.pdf, ComponentLink1URL=https://datasheet.ciiva.com/851/10118194-851110.pdf, ComponentLink2Description=https://datasheet.ciiva.com/851/10118194-851111.pdf, ComponentLink2URL=https://datasheet.ciiva.com/851/10118194-851111.pdf, ComponentLink3Description=https://datasheet.ciiva.com/4598/10118194ac-197217-4598807.pdf, ComponentLink3URL=https://datasheet.ciiva.com/4598/10118194ac-197217-4598807.pdf, ComponentLink4Description=https://datasheet.ciiva.com/29907/10118194-29907230.pdf, ComponentLink4URL=https://datasheet.ciiva.com/29907/10118194-29907230.pdf, ComponentLink5Description=https://datasheet.ciiva.com/26945/getdatasheetpartid-418619-26945695.pdf, ComponentLink5URL=https://datasheet.ciiva.com/26945/getdatasheetpartid-418619-26945695.pdf, Connector Type=USB,Receptacle, Contact Material="Copper Alloy", Contact Plating=Gold, Depth=5mm, Features=Shielded, Gender=Receptacle, Housing Material=Polymer, Lead Free="Lead Free", Length=8.05mm, Mount="Surface Mount,Horizontal", Number of Contacts=5, Number of Ports=1, Number of Terminals=5, Orientation="Right Angle", Packaging="Tape and Reel", Pitch=0.65mm, Pricing 1="1=0.48, 10=0.447, 25=0.402, 50=0.3574, 100=0.3424, 250=0.31264, 500=0.29776 (USD)", Radiation Hardening=No, Stock 1=77572, Supplier 1=Digi-Key, Termination=Solder
R1: "1 kOhms ¡À1% 0.063W, 1/16W Chip Resistor 0402 (1005 Metric) Moisture Resistant Thick Film", Case Code (Imperial)=0402, Case Code (Metric)=1005, Manufacturer=Yageo, Manufacturer Part Number=RC0402FR-071KL, Max Operating Temperature=155°C, Max Power Dissipation=63mW, Min Operating Temperature=-55°C, Power Rating=62.5mW, Resistance Tolerance=1%, Resistor Type="Thick Film", Supplier Part Number=311-1.00KLRTR-ND, Temperature Coefficient=100ppm/°C, Voltage Rating=50V, Case/Package=0402, Category="Chip SMD Resistors", ComponentLink1Description=https://datasheet.ciiva.com/11819/0900766b80c66297-11819477.pdf?src-supplier=Rs, ComponentLink1URL=https://datasheet.ciiva.com/11819/0900766b80c66297-11819477.pdf?src-supplier=Rs, ComponentLink2Description=https://datasheet.ciiva.com/7983/1018594-7983502.pdf?src-supplier=Element14, ComponentLink2URL=https://datasheet.ciiva.com/7983/1018594-7983502.pdf?src-supplier=Element14, ComponentLink3Description=https://datasheet.ciiva.com/22747/1018594-22747513.pdf?src-supplier=Element14, ComponentLink3URL=https://datasheet.ciiva.com/22747/1018594-22747513.pdf?src-supplier=Element14, ComponentLink4Description=https://datasheet.ciiva.com/12666/pyu-rc0402-51-rohs-l-6-r-12666741.pdf?src-supplier=Mouser, ComponentLink4URL=https://datasheet.ciiva.com/12666/pyu-rc0402-51-rohs-l-6-r-12666741.pdf?src-supplier=Mouser, ComponentLink5Description=https://datasheet.ciiva.com/7849/1018594-7849869.pdf?src-supplier=Element14, ComponentLink5URL=https://datasheet.ciiva.com/7849/1018594-7849869.pdf?src-supplier=Element14, ComponentLink6Description=https://datasheet.ciiva.com/7849/1018594-7849871.pdf?src-supplier=Element14, ComponentLink6URL=https://datasheet.ciiva.com/7849/1018594-7849871.pdf?src-supplier=Element14, ComponentLink7Description=https://datasheet.ciiva.com/17063/pyu-rc0402-51-rohs-l-6-r-17063193.pdf?src-supplier=Future+Electronics, ComponentLink7URL=https://datasheet.ciiva.com/17063/pyu-rc0402-51-rohs-l-6-r-17063193.pdf?src-supplier=Future+Electronics, Construction=Rectangular, Depth=0.5mm, Features="Moisture Resistant", Height=0.32mm, Lead Free="Lead Free", Length=1mm, Military Standard=Not, Number of Terminations=2, Packaging="Tape and Reel", Pins=2, Pricing="10000=0.00261, 20000=0.00231, 30000=0.00216, 50000=0.00199, 100000=0.00179 (USD)", Reach SVHC Compliant=No, RoHS=Yes, RoHS Compliant=Yes, Series=RC, Stock=29757748, Supplier=Digi-Key, Technology="THICK FILM", Termination=SMD/SMT, Tolerance=1%, Voltage Rating (DC)=50V, Width=0.5mm
R2: "10 kOhms 1% 0.063W, 1/16W Chip Resistor 0402 (1005 Metric) Moisture Resistant Thick Film", Case Code (Imperial)=0402, Case Code (Metric)=1005, Manufacturer="Stackpole Electronics", Manufacturer Part Number=RMCF0402FT10K0, Max Operating Temperature=155°C, Max Power Dissipation=63mW, Min Operating Temperature=-55°C, Power Rating=62.5mW, Resistance Tolerance=1%, Resistor Type="Thick Film", Supplier Part Number=RMCF0402FT10K0TR-ND, Temperature Coefficient=100ppm/°C, Voltage Rating=50V, Case/Package=0402, Category="Chip SMD Resistors", ComponentLink1Description=https://datasheet.ciiva.com/11819/0900766b80c66297-11819477.pdf?src-supplier=Rs, ComponentLink1URL=https://datasheet.ciiva.com/11819/0900766b80c66297-11819477.pdf?src-supplier=Rs, ComponentLink2Description=https://datasheet.ciiva.com/7983/1018594-7983502.pdf?src-supplier=Element14, ComponentLink2URL=https://datasheet.ciiva.com/7983/1018594-7983502.pdf?src-supplier=Element14, ComponentLink3Description=https://datasheet.ciiva.com/22747/1018594-22747513.pdf?src-supplier=Element14, ComponentLink3URL=https://datasheet.ciiva.com/22747/1018594-22747513.pdf?src-supplier=Element14, ComponentLink4Description=https://datasheet.ciiva.com/12666/pyu-rc0402-51-rohs-l-6-r-12666741.pdf?src-supplier=Mouser, ComponentLink4URL=https://datasheet.ciiva.com/12666/pyu-rc0402-51-rohs-l-6-r-12666741.pdf?src-supplier=Mouser, ComponentLink5Description=https://datasheet.ciiva.com/7849/1018594-7849869.pdf?src-supplier=Element14, ComponentLink5URL=https://datasheet.ciiva.com/7849/1018594-7849869.pdf?src-supplier=Element14, ComponentLink6Description=https://datasheet.ciiva.com/7849/1018594-7849871.pdf?src-supplier=Element14, ComponentLink6URL=https://datasheet.ciiva.com/7849/1018594-7849871.pdf?src-supplier=Element14, ComponentLink7Description=https://datasheet.ciiva.com/17063/pyu-rc0402-51-rohs-l-6-r-17063193.pdf?src-supplier=Future+Electronics, ComponentLink7URL=https://datasheet.ciiva.com/17063/pyu-rc0402-51-rohs-l-6-r-17063193.pdf?src-supplier=Future+Electronics, Construction=Rectangular, Depth=0.5mm, Features="Moisture Resistant", Height=0.32mm, Lead Free="Lead Free", Length=1mm, Military Standard=Not, Number of Terminations=2, Packaging="Tape and Reel", Pins=2, Pricing="10000=0.00261, 20000=0.00231, 30000=0.00216, 50000=0.00199, 100000=0.00179 (USD)", Reach SVHC Compliant=No, RoHS=Yes, RoHS Compliant=Yes, Series=RC, Stock=29757748, Supplier=Digi-Key, Technology="THICK FILM", Termination=SMD/SMT, Tolerance=1%, Voltage Rating (DC)=50V, Width=0.5mm
R20: "RES TF 30.9K OHM 1% 1/16W 0402", Manufacturer="Stackpole Electronics Inc", Manufacturer Part Number=RMCF0402FT30K9, Package / Case="0402 (1005 Metric)", Power (Watts)="0.063W, 1/16W", Resistance (Ohms)=30.9K, Supplier Part Number 1=RMCF0402FT30K9CT-ND, Temperature Coefficient=±100ppm/°C, Tolerance=±1%, Category=Resistors, ComponentLink1Description=http://www.seielect.com/Catalog/SEI-RMCF.pdf, ComponentLink1URL=http://www.seielect.com/Catalog/SEI-RMCF.pdf, Composition="Thick Film", Features=-, Height="0.016\" (0.40mm)", LatestRevisionDate=2-Dec-2009, Number of Terminations=2, Packaging="Cut Tape (CT)", Pricing 1="1=0.04, 10=0.025, 50=0.0138, 100=0.0105, 250=0.0078, 500=0.00576, 1000=0.00384 (USD)", RoHS="RoHS Compliant", Size / Dimension="0.039\" L x 0.020\" W (1.00mm x 0.50mm)", Stock 1=6328, Supplier 1=Digi-Key
R21: "RES 10.0K OHM 1/16W 1% 0402 SMD", Manufacturer=Yageo, Manufacturer Part Number=RC0402FR-0710KL, Package / Case="0402 (1005 Metric)", Power (Watts)="0.063W, 1/16W", Resistance (Ohms)=10K, Supplier Part Number 1=311-10.0KLRCT-ND, Temperature Coefficient=±100ppm/°C, Tolerance=±1%, Category=Resistors, ComponentLink1Description=http://www.yageo.com/documents/recent/PYu-RC0402_51_RoHS_L_6.pdf, ComponentLink1URL=http://www.yageo.com/documents/recent/PYu-RC0402_51_RoHS_L_6.pdf, Composition="Thick Film", Features=-, Height="0.014\" (0.35mm)", LatestRevisionDate=2-Dec-2009, Number of Terminations=2, Packaging="Cut Tape (CT)", Pricing 1="10=0.014, 50=0.0104, 100=0.0079, 250=0.00584, 500=0.00432, 1000=0.00288 (USD)", RoHS="RoHS Compliant", Size / Dimension="0.039\" L x 0.020\" W (1.00mm x 0.50mm)", Stock 1=5597980, Supplier 1=Digi-Key
U1: library part IS-IMX-6, "Inertial Sense IMX", Manufacturer="Inertial Sense", Manufacturer Part Number=IS-IMX-6, Supplier 1="Inertial Sense", Supplier Part Number 1=IS-IMX-6
U2: library part IS-GPX-1.0, "Inertial Sense GPX", Manufacturer="Inertial Sense", Manufacturer Part Number=IS-GPX-1, Supplier 1="Inertial Sense", Supplier Part Number 1=IS-GPX-1
U3: "ESD SUPPRESS 5.5V 36W 3-Line USB", Breakdown Voltage="6.5 V", Capacitance="0.7 pF", Clamping Voltage="18 V", Manufacturer="Vishay Semiconductors", Manufacturer Part Number=VBUS053AZ-HAF-GS08, Operating Temperature Range="- 40 C to + 125 C", Operating Voltage="5.5 V (Min)", Package / Case=LLP-75, Supplier Part Number 1=78-VBUS053AZ-HAF, Category="ESD Suppressors", ComponentLink1Description=http://www.vishay.com/docs/81845/vbus053a.pdf, ComponentLink1URL=http://www.vishay.com/docs/81845/vbus053a.pdf, Minimum Order Quantity=1, Packaging=Reel, Pricing 1="1=1.04, 10=0.918, 50=0.805, 100=0.689, 500=0.574, 1000=0.446, 3000=0.366, 9000=0.335 (AUD)", Product Category="Transient Voltage Suppressors", Reeling=True, RoHS="RoHS Compliant", RoHS - Mouser=Y, Series=VBUS053AZ-HAF, Stock 1=8176, Supplier 1=Mouser
U4: library part IG_2.0_LGA, "IMX multi-frequency RTK-GNSS Module"
U5: "IC BUCK ADJ 1.2A 6TSOT", Current - Output=1.2A, Frequency - Switching=1.4MHz, Manufacturer="Analog Devices Inc", Manufacturer Part Number=ADP2301AUJZ-R7, Operating Temperature="-40°C ~ 125°C", Package / Case="SOT-23-6 Thin, TSOT-23-6", Supplier Device Package=TSOT-6, Supplier Part Number 1=ADP2301AUJZ-R7CT-ND, Voltage - Input="3 V ~ 20 V", Voltage - Output="0.8 V ~ 17 V", Category="Integrated Circuits (ICs)", ComponentLink1Description=http://www.analog.com/static/imported-files/data_sheets/ADP2300_2301.pdf, ComponentLink1URL=http://www.analog.com/static/imported-files/data_sheets/ADP2300_2301.pdf, Mounting Type="Surface Mount", Number of Outputs=1, Output Type=Adjustable, Packaging="Cut Tape (CT)", Pricing 1="1=3.06, 25=2.4992, 100=2.244, 250=2.04, 500=1.785, 1000=1.53 (USD)", PWM Type="Current Mode", RoHS="RoHS Compliant", Stock 1=6699, Supplier 1=Digi-Key, Synchronous Rectifier=No, Type="Step-Down (Buck)"

## Via types
v1: diameter 18, hole 8, Top to Bottom, 276 vias

## Nets (pads, with @x,y where several pads share a name; then routed paths per layer and width w, separated by ;. In a path a pad name is that pad's centre, name@x,y a point inside that pad or via, vN(x,y) a via of type N, cw(c..) or ccw(c..) an arc to the next point about the centre after c; other vN are vias at no path point)
+3.3V: C1.1 C8.1 C17.1 D6.A H1.3 H2.1 H3.1 I5.2 R2.1 R20.2 U1.22 U1.30 U2.32 U2.40 U4.3 U4.30 | length 832.1
  Top w6: U1.30@1934.65,662.91 U1.30@1935.47,662.09
  Top w8: U1.30@1934.65,662.91 v1(1934.65,710.24)
  Top w10: v1(766.5,837.33) 766.5,816.59 776,807.09 H2.1@790.08,807.09
  Top w12: v1(1585.83,275.2) 1585.97,275.34 1611.73,275.34 R2.1@1611.88,275.48 ; D6.A@1612.51,711.3 1612.51,717.22 1620.09,724.8 v1(1641.34,724.8)
  Top w16: U2.40@1285.49,873.05 1285.49,855.34 1320.35,820.47 1327.95,820.47 1350.4,798.02 1394.48,798.02 1453.76,857.31 U2.32@1515.8,857.31 1523.55,849.56 1544.93,849.56 C1.1@1582.28,812.2 ; C1.1@1580.16,810.55 C1.1@1593.53,810.55 ; C1.1@1593.4,810.29 1593.53,810.42 1622.57,810.42 v1(1622.7,810.55)
  Top w25: H1.3@2237.67,777.61 2237.67,881.68 2251.87,895.88 U4.3@2251.87,966.09
  Bottom w10: v1(764.17,574.8) 764.17,597.59 773.67,607.09 H3.1@790.08,607.09
  other v1: 2171.76,674.9 2197.19,674.9 2222.62,674.9 2197.19,699.42 2222.62,699.42 2222.62,723.94 2237.67,834.99 2237.67,858.89
FB: R20.1 R21.2 U5.3 | length 274.8
  Top w10: v1@2395.44,620.9 2395.44,623.06 2397.21,624.84 2397.21,641.48 R20.1@2403.06,647.32 R21.2@2442.43,647.32 ; U5.3@2438.81,462.58 v1(2459.68,462.58)
  Mid1-Ver w10: v1(2395.61,621.07) 2395.61,573.86 2455.28,514.18 2455.28,469.14 2459.68,464.74 v1(2459.68,462.58)
G1/Rx2/RxCAN/SCL: H1.5 U1.4 U4.5 | length 895.2
  Top w6: v1@2039.71,497.38 v1(2040.37,496.73) ; v1(2089.5,713.57) 2109.9,713.57 2133.47,737.14 2133.47,771.83 H1.5@2139.25,777.61 2139.25,919.77 2151.87,932.39 2151.87,952.71 U4.5@2151.87,966.09
  Top w10: U1.4@1698.27,496.33 1698.46,496.13 v1(1756.54,496.13)
  Mid1-Ver w6: v1(1756.54,496.13) 1758.75,496.13 1766.22,503.6 2030.79,503.6 2037.66,496.73 v1(2040.37,496.73)
  Bottom w6: v1(2040.37,496.73) 2017.86,519.23 2017.86,641.93 v1(2089.5,713.57)
G2/Tx2TxCAN/SDA/STRB: H1.6 U1.5 U4.6 | length 886.2
  Top w6: v1(2017.86,466.16) 2017.86,580.5 2010.72,587.64 2010.72,699.27 2015.99,704.54 2038.62,704.54 2082.22,748.14 2082.22,769.8 H1.6@2090.03,777.61 2090.03,920.16 2101.87,932 2101.87,952.71 U4.6@2101.87,966.09
  Top w10: U1.5@1699.69,444.9 1711.87,457.08 1755.6,457.08 v1(1756.69,458.17)